# Altium PCB PCB_A5-2x3_Stamp.PcbDoc
Units mm, origin at the board's own origin, x right, y up, seen from the top; angles counter-clockwise.
Board outline 133.1 x 99.3 mm, 4 copper layers (Top Layer, Signal, AGND2, Bottom Layer), stack 0.337 mm thick; 11 components, 0 nets, 0 pads, 0 vias.
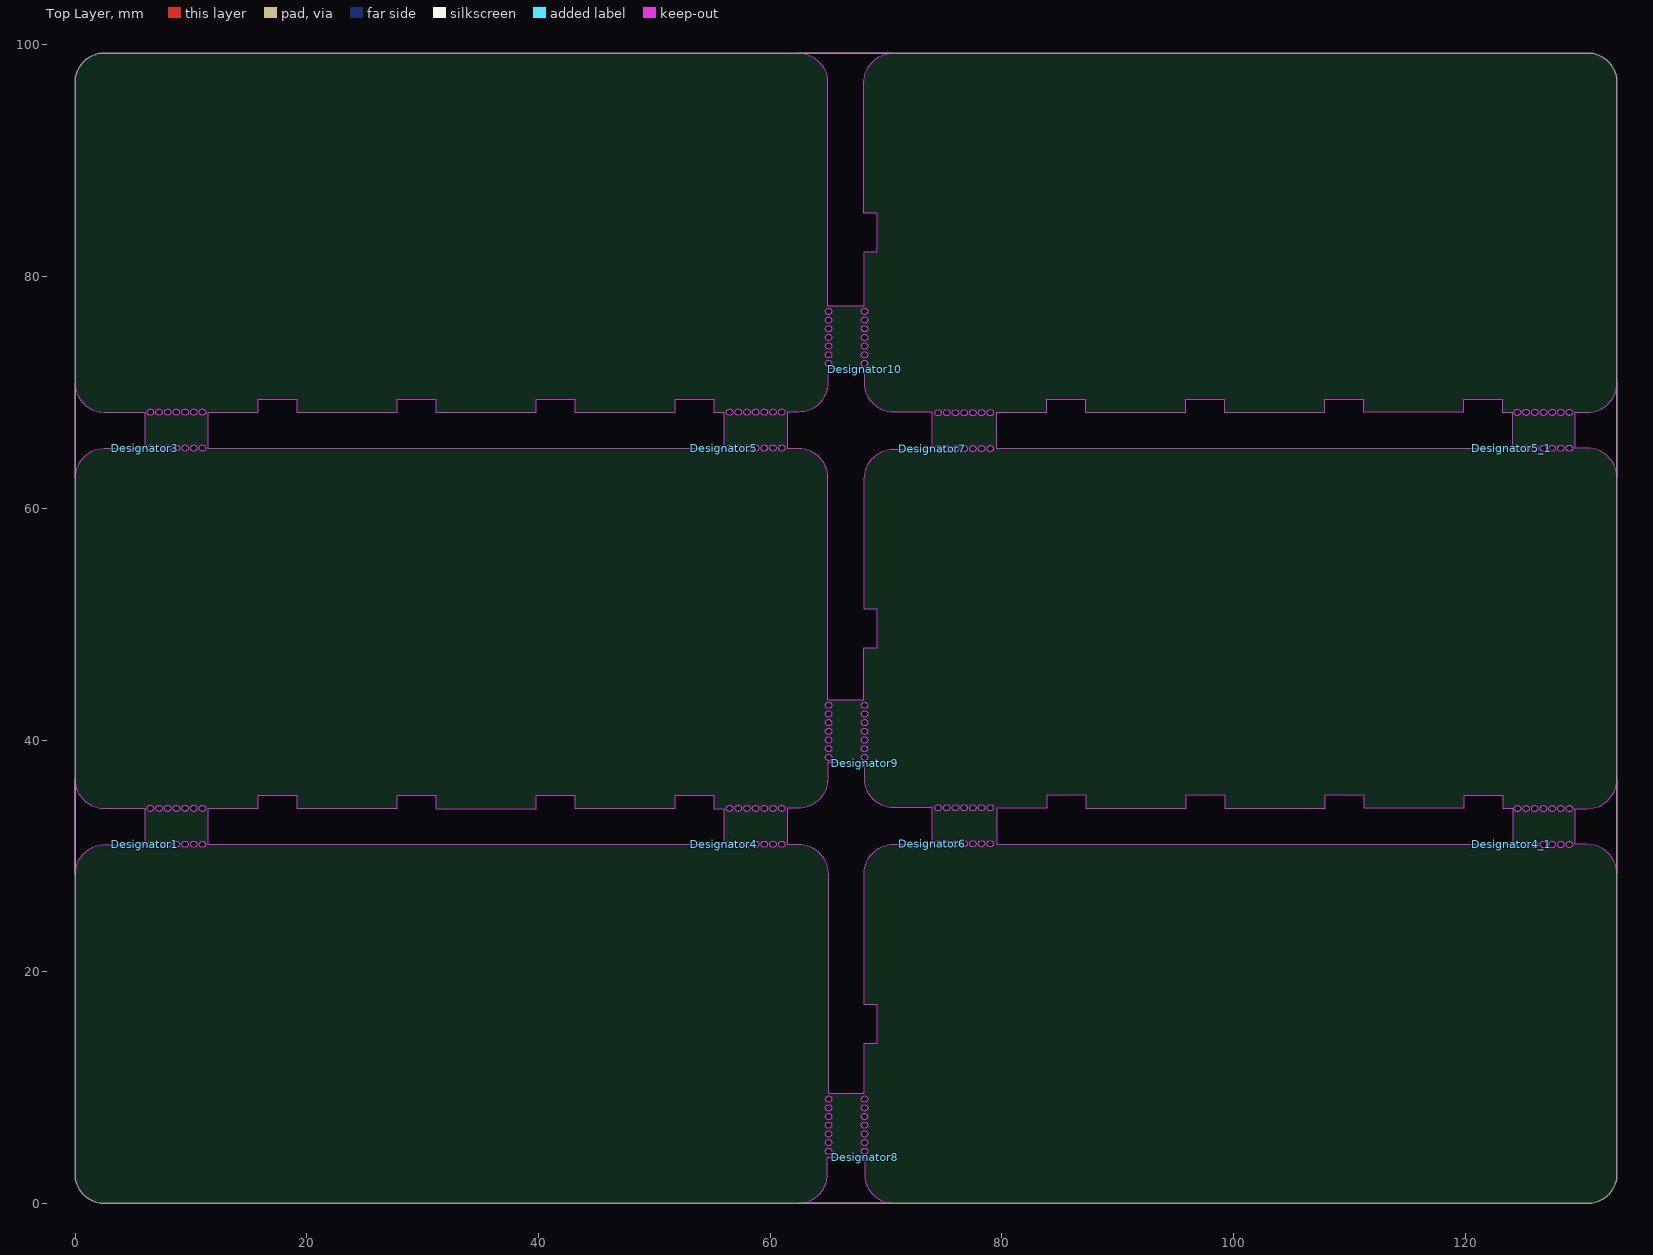
[diagram p0: Top Layer view]
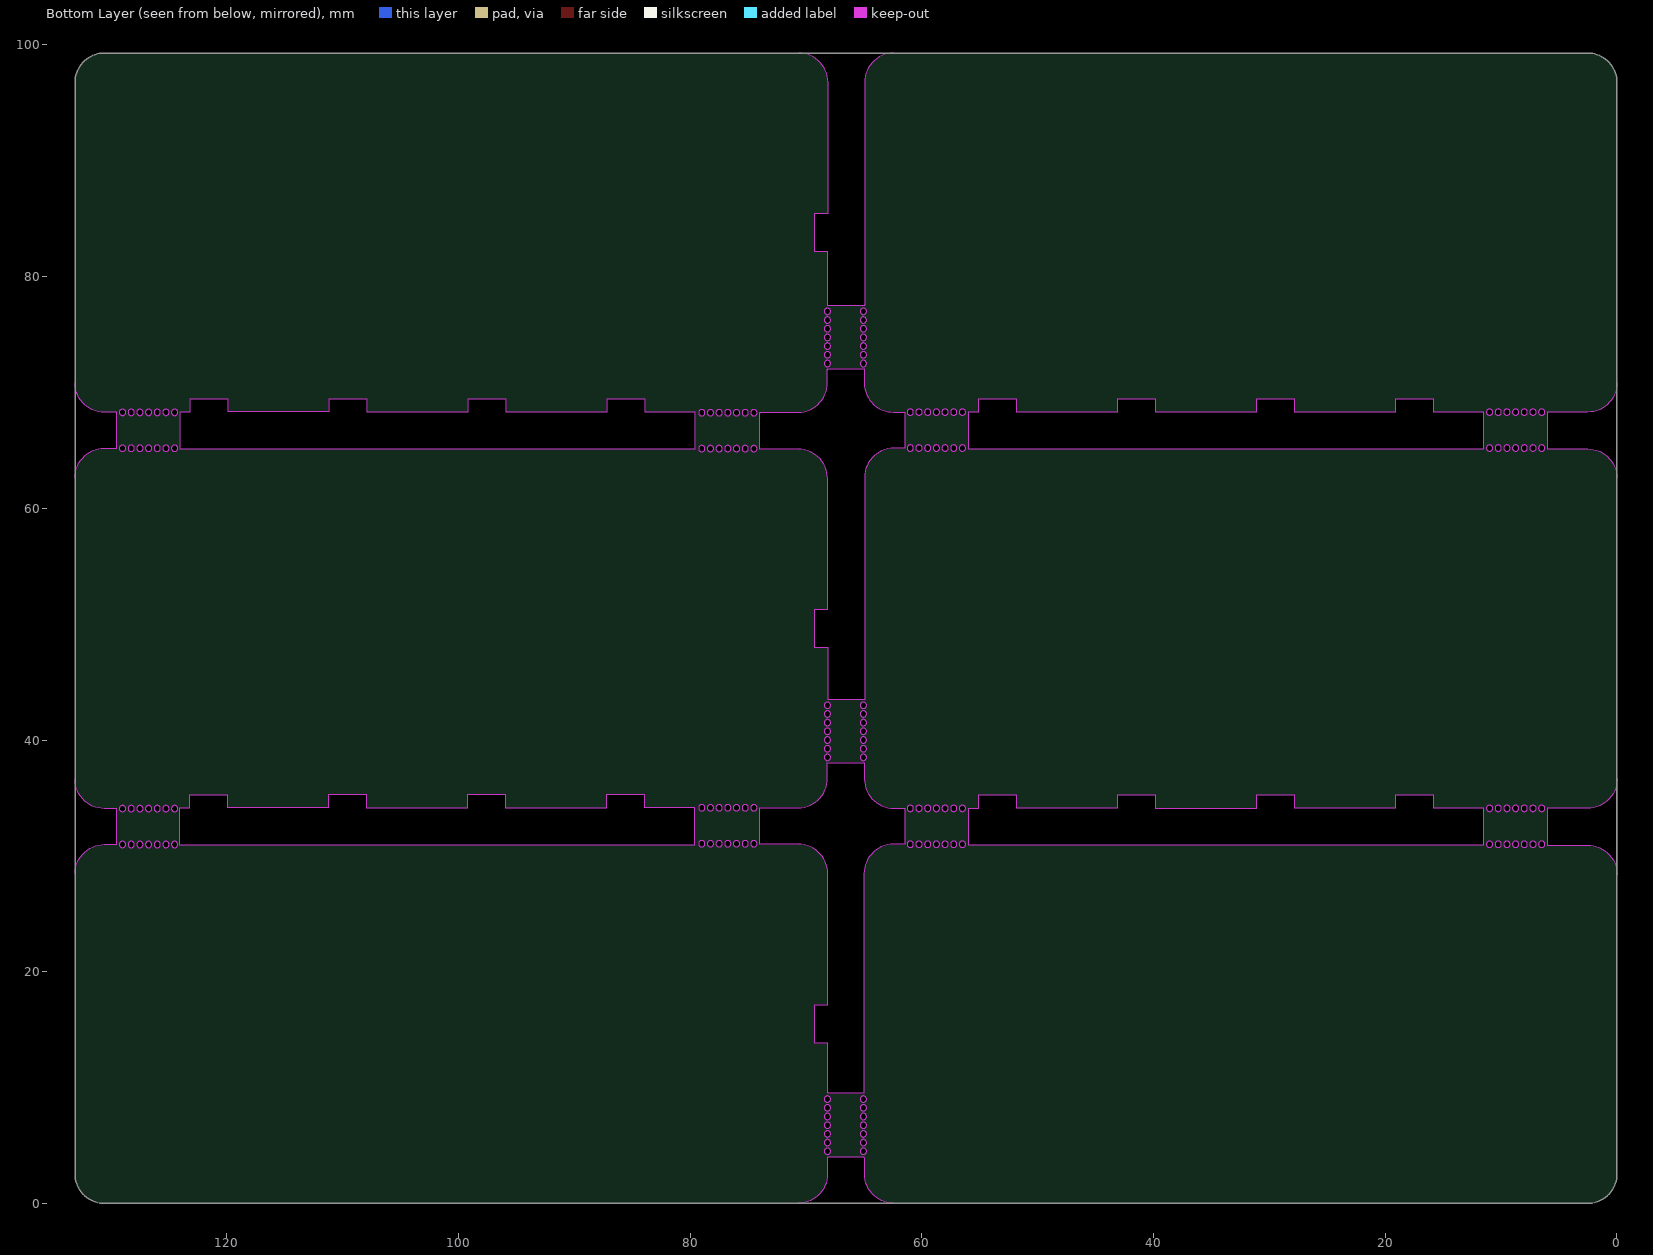
[diagram p1: Bottom Layer view, seen from below]
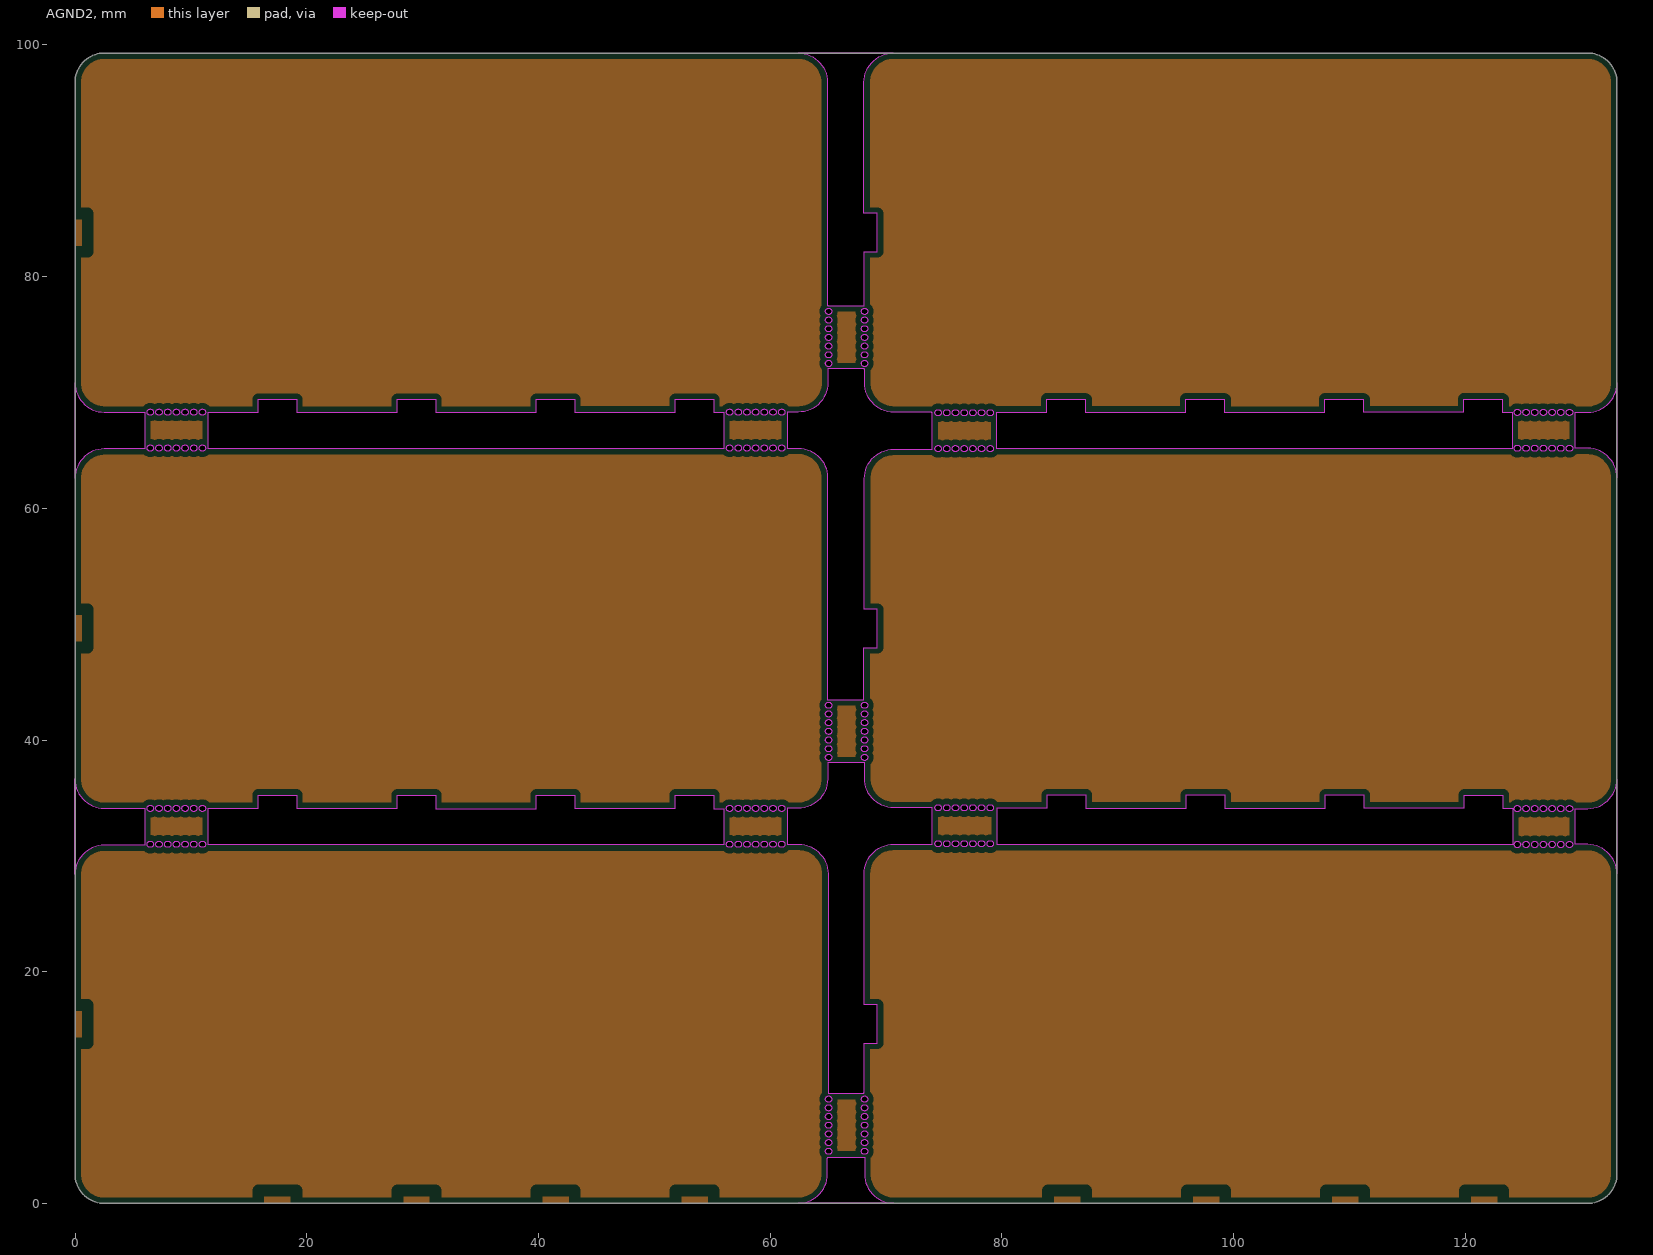
[diagram p2: AGND2, clearances drawn from the general rule]

## Layer stack, top to bottom
Top Solder: solder mask 0.0102, Solder Resist, Dk 3.5
Top Layer: signal copper 0.0356
Dielectric 2: prepreg 0.0711, PP-006, Dk 4.1
Signal: signal copper 0.018
Dielectric 1: prepreg 0.0711, PP-006, Dk 4.1
AGND2: plane copper 0.035
Dielectric 3: prepreg 0.0711, PP-006, Dk 4.1
Bottom Layer: signal copper 0.0356
Bottom Solder: solder mask 0.0102, Solder Resist, Dk 3.5

## Board outline
130.56,0 ccw(c130.56,2.54) 133.1,2.54 133.1,96.76 ccw(c130.56,96.76) 130.56,99.3 2.54,99.3 ccw(c2.54,96.76) 0,96.76 0,2.54 ccw(c2.54,2.54) 2.54,0
cut-out: 129.5,68.281 130.56,68.281 ccw(c130.56,70.821) 133.1,70.821 133.1,62.641 ccw(c130.56,62.641) 130.56,65.181 129.5,65.181
cut-out: 129.5,34.081 130.56,34.081 ccw(c130.56,36.621) 133.1,36.621 133.1,28.441 ccw(c130.56,28.441) 130.56,30.981 129.5,30.981
cut-out: 62.41,0 ccw(c62.41,2.54) 64.95,2.54 64.95,3.9 cw(c65.05,3.9) 65.05,4 68.15,4 68.15,2.54 ccw(c70.69,2.54) 70.69,0
cut-out: 61.5,31 62.46,31 cw(c62.46,28.46) 65,28.46 65,9.543 ccw(c65.048,9.543) 65.048,9.495 68.02,9.495 ccw(c68.02,9.593) 68.117,9.593 68.117,13.752 cw(c68.194,13.752) 68.194,13.829 69.233,13.829 ccw(c69.233,13.855) 69.259,13.855 69.259,17.103 ccw(c69.233,17.103) 69.233,17.128 68.189,17.128 cw(c68.189,17.189) 68.128,17.189 68.128,28.46 cw(c70.668,28.46) 70.668,31 73.95,31 ccw(c73.95,31.05) 74,31.05 74,34.15 70.69,34.15 cw(c70.69,36.69) 68.15,36.69 68.15,38.017 64.962,38.017 64.962,36.64 cw(c62.422,36.64) 62.422,34.1 61.5,34.1
cut-out: 61.5,68.3 61.5,65.2 62.41,65.2 cw(c62.41,62.66) 64.95,62.66 64.95,43.493 68.103,43.493 68.103,47.944 cw(c68.136,47.944) 68.136,47.978 69.226,47.978 ccw(c69.226,48.019) 69.268,48.019 69.268,51.245 ccw(c69.229,51.245) 69.229,51.284 68.166,51.284 cw(c68.166,51.31) 68.14,51.31 68.14,62.56 cw(c70.68,62.56) 70.68,65.1 73.95,65.1 ccw(c73.95,65.15) 74,65.15 74,68.177 ccw(c73.879,68.177) 73.879,68.298 70.69,68.298 cw(c70.69,70.838) 68.15,70.838 68.15,72 ccw(c68.112,72) 68.112,72.038 64.979,72.038 64.979,70.84 cw(c62.439,70.84) 62.439,68.3
cut-out: 64.986,77.496 64.986,77.5 68.132,77.5 68.132,82.15 69.261,82.15 69.261,85.45 68.1,85.45 68.1,96.76 cw(c70.64,96.76) 70.64,99.3 62.41,99.3 cw(c62.41,96.76) 64.95,96.76 64.95,77.521 ccw(c64.97,77.521) 64.97,77.502
cut-out: 79.611,34.135 83.933,34.135 83.933,35.255 87.234,35.255 87.234,34.129 95.939,34.129 95.939,35.255 99.24,35.255 99.24,34.122 107.938,34.122 107.938,35.257 111.236,35.257 111.236,34.141 119.933,34.141 119.933,35.251 123.24,35.251 123.24,34.114 124.109,34.114 124.109,30.972 79.611,30.972
cut-out: 79.56,68.31 83.882,68.31 83.882,69.43 87.183,69.43 87.183,68.304 95.888,68.304 95.888,69.43 99.189,69.43 99.189,68.297 107.887,68.297 107.887,69.432 111.185,69.432 111.185,68.316 119.882,68.316 119.882,69.426 123.189,69.426 123.189,68.289 124.058,68.289 124.058,65.147 79.56,65.147
cut-out: 11.5,34.1 15.822,34.1 15.822,35.221 19.123,35.221 19.123,34.094 27.828,34.094 27.828,35.22 31.129,35.22 31.129,34.087 39.827,34.087 39.827,35.222 43.125,35.222 43.125,34.107 51.822,34.107 51.822,35.216 55.129,35.216 55.129,34.079 55.998,34.079 55.998,30.938 11.5,30.938
cut-out: 11.5,68.3 15.822,68.3 15.822,69.42 19.123,69.42 19.123,68.294 27.828,68.294 27.828,69.42 31.129,69.42 31.129,68.287 39.827,68.287 39.827,69.422 43.125,69.422 43.125,68.307 51.822,68.307 51.822,69.416 55.129,69.416 55.129,68.279 55.998,68.279 55.998,65.137 11.5,65.137
cut-out: -0.006,36.64 ccw(c2.534,36.64) 2.534,34.1 6,34.1 6,30.931 2.534,30.931 ccw(c2.534,28.391) -0.006,28.391
cut-out: 0,70.84 ccw(c2.54,70.84) 2.54,68.3 6.006,68.3 6.006,65.131 2.54,65.131 ccw(c2.54,62.591) 0,62.591

## Design rules (kind name [scope] priority, off if disabled: settings)
Clearance [All] p1: gap=0.254 ignorepadtopadclearanceinfootprint=FALSE except(0: Arc-Hole Track-Hole SMDPad-Hole THPad-Hole Via-Hole Fill-Hole Poly-Hole Region-Hole Text-Hole)
PlaneClearance [All] p1: clearance=0.508
PlaneConnect [All] p1: planeconnectstyle=Relief reliefexpansion=0.508 reliefentries=4 reliefconductorwidth=0.254 reliefairgap=0.254
PolygonConnect [All] p1: connectstyle=Relief reliefconductorwidth=0.254 reliefentries=4 polygonreliefangle="90 Angle" airgapwidth=0.254
RoutingVias [All] p1: holewidth=0.711 width=1.27 viastyle="Through Hole" minholewidth=0.711 minwidth=1.27 maxholewidth=0.711 maxwidth=1.27
SolderMaskExpansion [All] p1: expansion=0.102 istentingtop=FALSE
Width [All] p1: maxlimit=0.254 minlimit=0.254 preferedwidth=0.254
28 further rules are at their usual default settings.

## Components (designator, comment, footprint, x,y, rotation, side; value= is the part's Value field where it differs from the comment)
Designator1 "Comment" "STAMP_HOLE 3*0.1MM" 6,31 r0 top
Designator3 "Comment" "STAMP_HOLE 3*0.1MM" 6,65.2 r0 top
Designator4 "Comment" "STAMP_HOLE 3*0.1MM" 56,31 r0 top
Designator4_1 "Comment" "STAMP_HOLE 3*0.1MM" 124,30.981 r0 top
Designator5 "Comment" "STAMP_HOLE 3*0.1MM" 56,65.2 r0 top
Designator5_1 "Comment" "STAMP_HOLE 3*0.1MM" 124,65.181 r0 top
Designator6 "Comment" "STAMP_HOLE 3*0.1MM" 74,31.05 r0 top
Designator7 "Comment" "STAMP_HOLE 3*0.1MM" 74,65.15 r0 top
Designator8 "Comment" "STAMP_HOLE 3*0.1MM" 68.15,4 r90 top
Designator9 "Comment" "STAMP_HOLE 3*0.1MM" 68.15,38 r90 top
Designator10 "Comment" "STAMP_HOLE 3*0.1MM" 68.15,72 r90 top

## Footprints (in the part's own frame and the unit in brackets; to place one, negate y for a bottom-side part, rotate by r counter-clockwise, add the part's x,y. Pads: shape width x height; smd on the part's side, far side on the other; paste and mask are expansions set on the pad)
"STAMP_HOLE 3*0.1MM" [mm]
  Keep-Out Layer board cut-out: 0.5,2.825 0.395,2.846 0.306,2.906 0.246,2.995 0.225,3.1 0.225,3.1 0.246,3.205 0.306,3.294 0.395,3.354 0.5,3.375 0.5,3.375 0.605,3.354 0.694,3.294 0.754,3.205 0.775,3.1 0.775,3.1 0.754,2.995 0.694,2.906 0.605,2.846 0.5,2.825
  Keep-Out Layer board cut-out: 1.25,2.825 1.145,2.846 1.056,2.906 0.996,2.995 0.975,3.1 0.975,3.1 0.996,3.205 1.056,3.294 1.145,3.354 1.25,3.375 1.25,3.375 1.355,3.354 1.444,3.294 1.504,3.205 1.525,3.1 1.525,3.1 1.504,2.995 1.444,2.906 1.355,2.846 1.25,2.825
  Keep-Out Layer board cut-out: 2,2.825 1.895,2.846 1.806,2.906 1.746,2.995 1.725,3.1 1.725,3.1 1.746,3.205 1.806,3.294 1.895,3.354 2,3.375 2,3.375 2.105,3.354 2.194,3.294 2.254,3.205 2.275,3.1 2.275,3.1 2.254,2.995 2.194,2.906 2.105,2.846 2,2.825
  Keep-Out Layer board cut-out: 2.75,2.825 2.645,2.846 2.556,2.906 2.496,2.995 2.475,3.1 2.475,3.1 2.496,3.205 2.556,3.294 2.645,3.354 2.75,3.375 2.75,3.375 2.855,3.354 2.944,3.294 3.004,3.205 3.025,3.1 3.025,3.1 3.004,2.995 2.944,2.906 2.855,2.846 2.75,2.825
  Keep-Out Layer board cut-out: 3.5,2.825 3.395,2.846 3.306,2.906 3.246,2.995 3.225,3.1 3.225,3.1 3.246,3.205 3.306,3.294 3.395,3.354 3.5,3.375 3.5,3.375 3.605,3.354 3.694,3.294 3.754,3.205 3.775,3.1 3.775,3.1 3.754,2.995 3.694,2.906 3.605,2.846 3.5,2.825
  Keep-Out Layer board cut-out: 4.25,2.825 4.145,2.846 4.056,2.906 3.996,2.995 3.975,3.1 3.975,3.1 3.996,3.205 4.056,3.294 4.145,3.354 4.25,3.375 4.25,3.375 4.355,3.354 4.444,3.294 4.504,3.205 4.525,3.1 4.525,3.1 4.504,2.995 4.444,2.906 4.355,2.846 4.25,2.825
  Keep-Out Layer board cut-out: 5,2.825 4.895,2.846 4.806,2.906 4.746,2.995 4.725,3.1 4.725,3.1 4.746,3.205 4.806,3.294 4.895,3.354 5,3.375 5,3.375 5.105,3.354 5.194,3.294 5.254,3.205 5.275,3.1 5.275,3.1 5.254,2.995 5.194,2.906 5.105,2.846 5,2.825
  Keep-Out Layer board cut-out: 5,-0.275 4.895,-0.254 4.806,-0.194 4.746,-0.105 4.725,0 4.725,0 4.746,0.105 4.806,0.194 4.895,0.254 5,0.275 5,0.275 5.105,0.254 5.194,0.194 5.254,0.105 5.275,0 5.275,0 5.254,-0.105 5.194,-0.194 5.105,-0.254 5,-0.275
  Keep-Out Layer board cut-out: 4.25,-0.275 4.145,-0.254 4.056,-0.194 3.996,-0.105 3.975,0 3.975,0 3.996,0.105 4.056,0.194 4.145,0.254 4.25,0.275 4.25,0.275 4.355,0.254 4.444,0.194 4.504,0.105 4.525,0 4.525,0 4.504,-0.105 4.444,-0.194 4.355,-0.254 4.25,-0.275
  Keep-Out Layer board cut-out: 3.5,-0.275 3.395,-0.254 3.306,-0.194 3.246,-0.105 3.225,0 3.225,0 3.246,0.105 3.306,0.194 3.395,0.254 3.5,0.275 3.5,0.275 3.605,0.254 3.694,0.194 3.754,0.105 3.775,0 3.775,0 3.754,-0.105 3.694,-0.194 3.605,-0.254 3.5,-0.275
  Keep-Out Layer board cut-out: 2.75,-0.275 2.645,-0.254 2.556,-0.194 2.496,-0.105 2.475,0 2.475,0 2.496,0.105 2.556,0.194 2.645,0.254 2.75,0.275 2.75,0.275 2.855,0.254 2.944,0.194 3.004,0.105 3.025,0 3.025,0 3.004,-0.105 2.944,-0.194 2.855,-0.254 2.75,-0.275
  Keep-Out Layer board cut-out: 2,-0.275 1.895,-0.254 1.806,-0.194 1.746,-0.105 1.725,0 1.725,0 1.746,0.105 1.806,0.194 1.895,0.254 2,0.275 2,0.275 2.105,0.254 2.194,0.194 2.254,0.105 2.275,0 2.275,0 2.254,-0.105 2.194,-0.194 2.105,-0.254 2,-0.275
  Keep-Out Layer board cut-out: 1.25,-0.275 1.145,-0.254 1.056,-0.194 0.996,-0.105 0.975,0 0.975,0 0.996,0.105 1.056,0.194 1.145,0.254 1.25,0.275 1.25,0.275 1.355,0.254 1.444,0.194 1.504,0.105 1.525,0 1.525,0 1.504,-0.105 1.444,-0.194 1.355,-0.254 1.25,-0.275
  Keep-Out Layer board cut-out: 0.5,-0.275 0.395,-0.254 0.306,-0.194 0.246,-0.105 0.225,0 0.225,0 0.246,0.105 0.306,0.194 0.395,0.254 0.5,0.275 0.5,0.275 0.605,0.254 0.694,0.194 0.754,0.105 0.775,0 0.775,0 0.754,-0.105 0.694,-0.194 0.605,-0.254 0.5,-0.275

## Nets (pads, with @x,y where several pads share a name; then routed paths per layer and width w, separated by ;. In a path a pad name is that pad's centre, name@x,y a point inside that pad or via, vN(x,y) a via of type N, cw(c..) or ccw(c..) an arc to the next point about the centre after c; other vN are vias at no path point)

## Polygon pours and split planes (outlines as drawn)
no net on AGND2 (split plane): 181 vertices, not listed, extent 124.569,65.873 128.99,67.589
no net on AGND2 (split plane): 459 vertices, not listed, extent 68.61,68.792 132.59,98.79
no net on AGND2 (split plane): 190 vertices, not listed, extent 74.51,31.742 79.1,33.458
no net on AGND2 (split plane): 675 vertices, not listed, extent 68.613,34.592 132.59,64.671
no net on AGND2 (split plane): 185 vertices, not listed, extent 74.51,65.842 79.05,67.558
no net on AGND2 (split plane): 195 vertices, not listed, extent 65.742,72.548 67.458,76.99
no net on AGND2 (split plane): 195 vertices, not listed, extent 65.742,38.528 67.458,42.983
no net on AGND2 (split plane): 180 vertices, not listed, extent 124.62,31.673 128.99,33.389
no net on AGND2 (split plane): 446 vertices, not listed, extent 68.628,0.51 132.59,30.49
no net on AGND2 (split plane): 122.771,0 120.489,0 120.489,0.6 122.771,0.6
no net on AGND2 (split plane): 110.771,0 108.49,0 108.49,0.6 110.771,0.6
no net on AGND2 (split plane): 86.771,0 84.49,0 84.49,0.6 86.771,0.6
no net on AGND2 (split plane): 195 vertices, not listed, extent 65.742,4.51 67.458,8.985
no net on AGND2 (split plane): 98.771,0 96.49,0 96.49,0.6 98.771,0.6
no net on AGND2 (split plane): 185 vertices, not listed, extent 56.509,65.892 60.99,67.608
no net on AGND2 (split plane): 486 vertices, not listed, extent 0.51,68.789 64.469,98.79
no net on AGND2 (split plane): 185 vertices, not listed, extent 56.509,31.692 60.99,33.408
no net on AGND2 (split plane): 677 vertices, not listed, extent 0.51,34.589 64.452,64.69
no net on AGND2 (split plane): 185 vertices, not listed, extent 6.516,65.892 10.99,67.608
no net on AGND2 (split plane): 0.597,82.65 0,82.65 0,84.931 0.597,84.931
no net on AGND2 (split plane): 0.597,48.494 0,48.494 0,50.775 0.597,50.775
no net on AGND2 (split plane): 54.617,0 52.336,0 52.336,0.6 54.617,0.6
no net on AGND2 (split plane): 472 vertices, not listed, extent 0.51,0.51 64.49,30.49
no net on AGND2 (split plane): 42.617,0 40.336,0 40.336,0.6 42.617,0.6
no net on AGND2 (split plane): 30.617,0 28.336,0 28.336,0.6 30.617,0.6
no net on AGND2 (split plane): 185 vertices, not listed, extent 6.51,31.692 10.99,33.408
no net on AGND2 (split plane): 0.597,14.339 0,14.339 0,16.62 0.597,16.62
no net on AGND2 (split plane): 18.617,0 16.336,0 16.336,0.6 18.617,0.6

## Silkscreen, mask and mechanical layers (free items; w line width, h text height)
Mechanical 1:
  text "CNC" at 34.2,66.319 h3
  text "CNC" at 101.85,66.219 h3
  text "CNC" at 65.4,66.019 h3
  text "CNC" at 33.45,32.069 h3
  text "CNC" at 101.35,31.969 h3
  text "CNC" at 64.9,31.119 h3

## Panel: embedded boards
"PCB_SoundWedge-A5.pcbdoc" at -0.1,-0.1, 3 rows x 2 columns, spacing 34.156 x 68.153, rotation 0